# Altium PCB ECB02-Kit-V1.0.PcbDoc
Units mm, origin at the board's own origin, x right, y up, seen from the top; angles counter-clockwise.
Board outline 21 x 30.5 mm, 2 copper layers (Top Layer, Bottom Layer); 9 components, 15 nets, 58 pads, 48 vias.
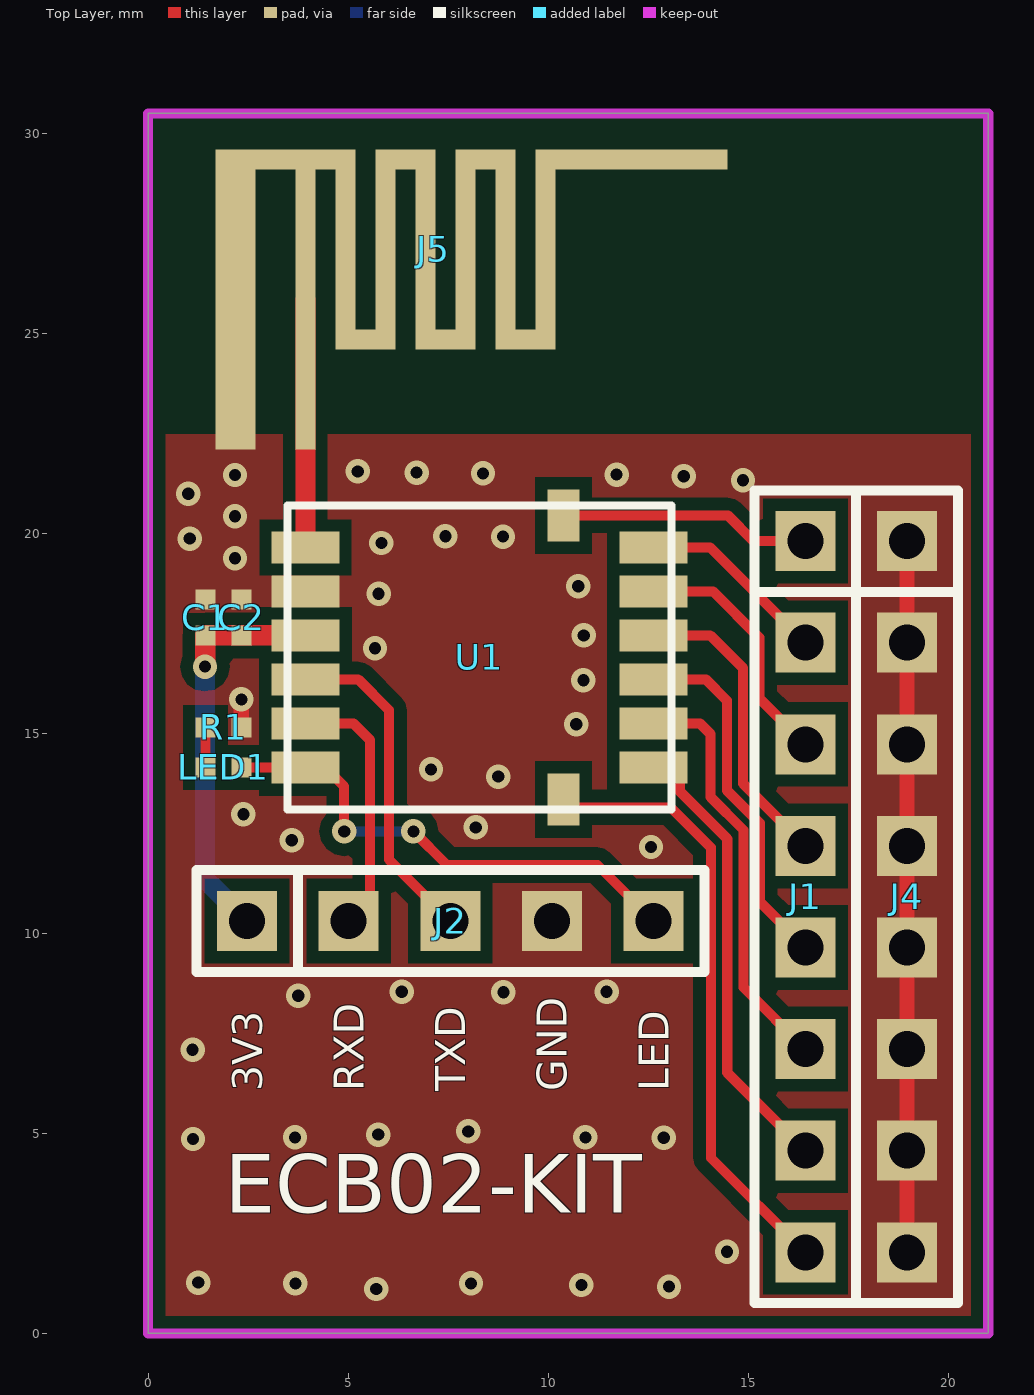
[diagram p0: Top Layer view]
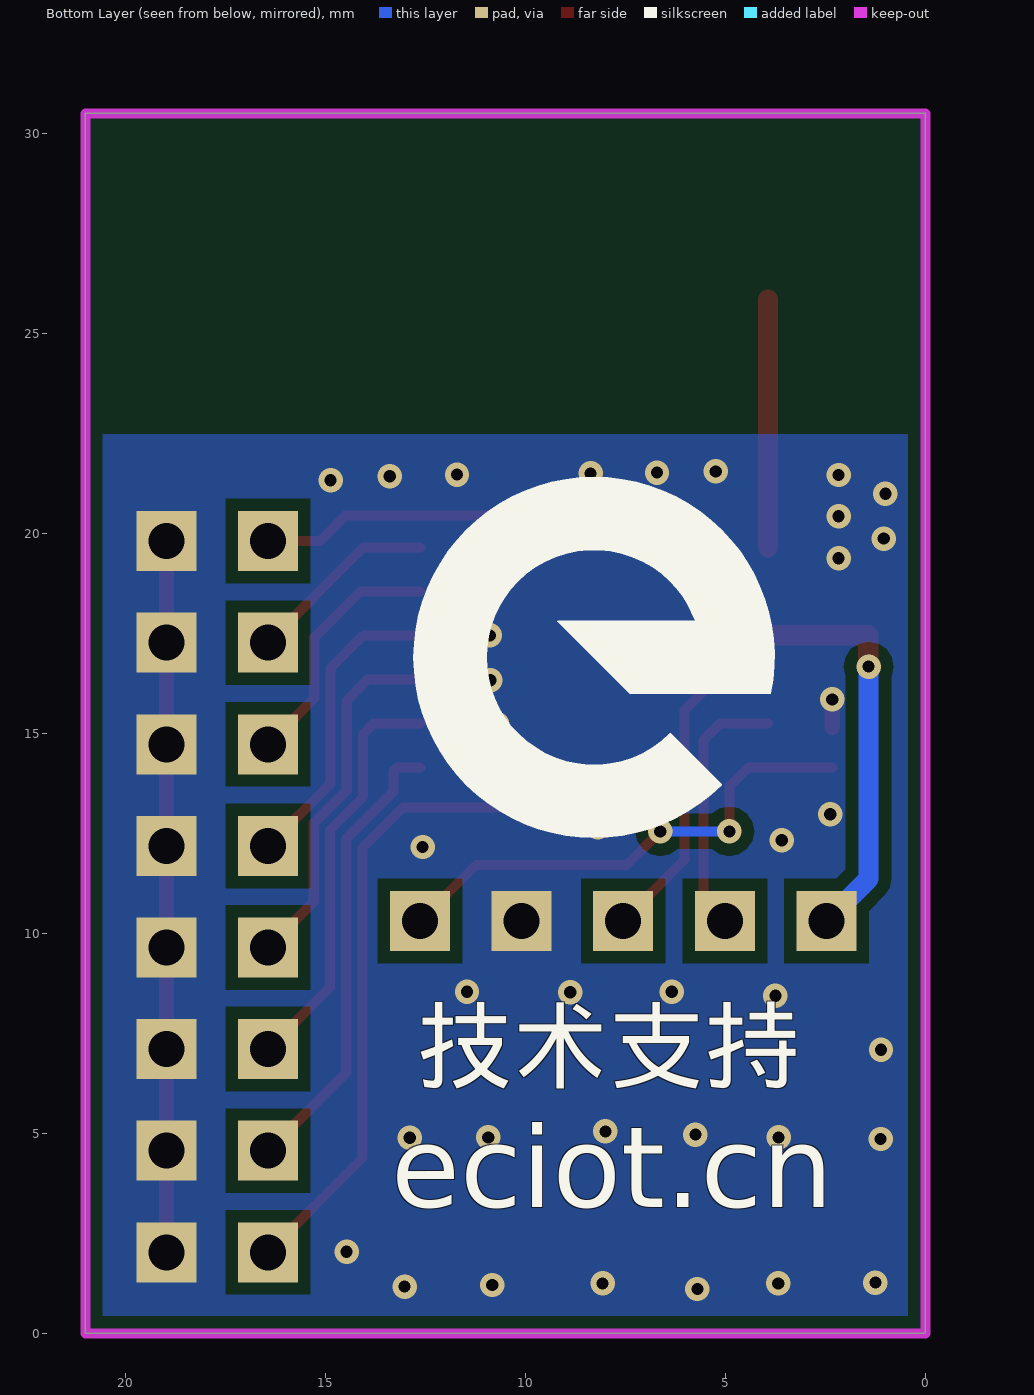
[diagram p1: Bottom Layer view, seen from below]

## Layer stack, top to bottom
Top Solder: solder mask 0.0102, Solder Resist, Dk 3.5
Top Layer: signal copper 0.0356
Dielectric 1: dielectric 0.32, FR-4, Dk 4.8
Bottom Layer: signal copper 0.0356
Bottom Solder: solder mask 0.0102, Solder Resist, Dk 3.5

## Board outline
0,0 0,30.5 21,30.5 21,0

## Design rules (kind name [scope] priority, off if disabled: settings)
Clearance [All] p1: gap=0.152 ignorepadtopadclearanceinfootprint=FALSE except(0: Arc-Hole Track-Hole SMDPad-Hole THPad-Hole Via-Hole Fill-Hole Poly-Hole Region-Hole Text-Hole)
PlaneConnect [All] p1: planeconnectstyle=Direct reliefexpansion=0.508 reliefentries=4 reliefconductorwidth=0.254 reliefairgap=0.254
PolygonConnect [All] p1: connectstyle=Direct reliefconductorwidth=0.254 reliefentries=4 polygonreliefangle="90 Angle" airgapwidth=0.254
RoutingVias [All] p1: holewidth=0.711 width=1.27 viastyle="Through Hole" minholewidth=0.711 minwidth=1.27 maxholewidth=0.711 maxwidth=1.27
SolderMaskExpansion [All] p1: expansion=0.102
Width [All] p1: maxlimit=2.54 minlimit=0.152 preferedwidth=0.254 minimp=50.000000 maximp=50.000000 favimp=50.000000
29 further rules are at their usual default settings.

## Components (designator, comment, footprint, x,y, rotation, side; value= is the part's Value field where it differs from the comment)
C1 "10uF" 0402 1.43,17.9 r270 top
C2 "100nF" 0402 2.33,17.9 r270 top
J1 "CON8" SIP08 16.43,19.807 r270 top
J2 "CON5" SIP05 2.473,10.31 r0 top
J4 "CON8" SIP08 18.97,19.807 r270 top
J5 "ANT" ANT-2.4G-1 2.18,25.85 r0 top
LED1 "0402 蓝" 0402-led 1.88,14.15 r180 top
R1 "2.2kΩ" 0402 1.88,15.15 r0 top
U1 "ECB02S" ECB02S 8.28,16.9 r0 top

## Footprints (in the part's own frame and the unit in brackets; to place one, negate y for a bottom-side part, rotate by r counter-clockwise, add the part's x,y. Pads: shape width x height; smd on the part's side, far side on the other; paste and mask are expansions set on the pad)
0402 [mm]
  rect 0.5x0.5 smd paste+0: 1(-0.45,0) 2(0.45,0)
0402-led [mm]
  rect 0.5x0.5 smd paste+0: 1(-0.45,0) 2(0.45,0)
ANT-2.4G-1 [mm]
  rect 0.5x7.5 smd: 1(1.75,0)
  rect 1x7.5 smd: 2(0,0)
  rect 3.5x0.5 smd: 2(1.25,3.5)
  rect 0.5x5 smd: 2(2.75,1.25) 2(3.75,1.25) 2(4.75,1.25) 2(5.75,1.25) 2(6.75,1.25) 2(7.75,1.25)
  rect 1.5x0.5 smd: 2(3.25,-1) 2(4.25,3.5) 2(5.25,-1) 2(6.25,3.5) 2(7.25,-1)
  rect 4.8x0.5 smd: 2(9.9,3.5)
ECB02S [mm]
  rect 1.7x0.8 smd: 1(4.35,-2.75) 2(4.35,-1.65) 3(4.35,-0.55) 4(4.35,0.55) 5(4.35,1.65) 6(4.35,2.75) 8(-4.35,2.75) 9(-4.35,1.65) 10(-4.35,0.55) 11(-4.35,-0.55) 12(-4.35,-1.65) 13(-4.35,-2.75)
  rect 0.8x1.3 smd: 7(2.1,3.55) 14(2.1,-3.55)
  silkscreen extent -4.8,-3.8 4.8,3.8
SIP05 [mm]
  rect 1.5x1.5 hole 0.9: 1(0,0) 2(2.54,0) 3(5.08,0) 4(7.62,0) 5(10.16,0)
  silkscreen extent -1.27,-1.27 11.43,1.27
SIP08 [mm]
  rect 1.5x1.5 hole 0.9: 1(0,0) 2(2.54,0) 3(5.08,0) 4(7.62,0) 5(10.16,0) 6(12.7,0) 7(15.24,0) 8(17.78,0)
  silkscreen extent -1.27,-1.27 19.05,1.27

## Part data
C1 C2: library part C, 封装=0402, 类型=电容
LED1: library part LED-0402, 封装=0402, 类型=LED
R1: library part R, 封装=0402, 类型=电阻

## Via types
v1: diameter 0.61, hole 0.305, Top Layer to Bottom Layer, tented both sides, 48 vias

## Nets (pads, with @x,y where several pads share a name; then routed paths per layer and width w, separated by ;. In a path a pad name is that pad's centre, name@x,y a point inside that pad or via, vN(x,y) a via of type N, cw(c..) or ccw(c..) an arc to the next point about the centre after c; other vN are vias at no path point)
+3.3V: C1.2 C2.2 J2.1 U1.10 | length 10.1
  Top Layer w0.508: v1(1.42,16.67) 1.43,16.68 C1.2 C2.2 U1.10
  Bottom Layer w0.508: v1(1.42,16.67) 1.42,11.363 J2.1
GND: C1.1 C2.1 J2.4 J4.1 J4.2 J4.3 J4.4 J4.5 J4.6 J4.7 J4.8 J5.2 R1.2 U1.9 | length 18.5
  Top Layer w0.381: R1.2 v1(2.33,15.85) ; J4.8 J4.7 J4.6 J4.5 J4.4 J4.3 J4.2 J4.1
  other v1: 5.7,1.11 13.02,1.17 10.83,1.21 3.68,1.25 8.07,1.25 1.25,1.27 14.47,2.04 1.12,4.86 3.67,4.9 10.93,4.9 12.89,4.89 5.75,4.97 8,5.05 1.11,7.09 3.75,8.44 6.34,8.54 8.88,8.53 11.46,8.54 12.57,12.16 3.59,12.33 8.19,12.65 2.38,12.98 8.75,13.92 7.07,14.1 10.7,15.23 10.88,16.33 5.67,17.13 10.89,17.45 5.76,18.49 10.75,18.68 2.17,19.38 5.83,19.76 1.04,19.87 8.87,19.92 7.43,19.93 2.17,20.43 1,20.99 14.87,21.33 13.39,21.43 2.17,21.46 11.71,21.47 6.71,21.52 8.37,21.5 5.24,21.55
LED: J2.5 LED1.1 U1.13 | length 12.6
  Top Layer w0.254: LED1.1 U1.13 4.42,14.15 4.9,13.67 v1(4.9,12.55) ; v1(6.63,12.55) 7.47,11.71 11.233,11.71 J2.5
  Bottom Layer w0.254: v1(4.9,12.55) v1(6.63,12.55)
NetJ1_1: J1.1 U1.7 | length 6.3
  Top Layer w0.254: U1.7 14.49,20.45 15.133,19.807 J1.1
NetJ1_2: J1.2 U1.6 | length 4.8
  Top Layer w0.254: U1.6 14.047,19.65 J1.2
NetJ1_3: J1.3 U1.5 | length 6.3
  Top Layer w0.254: U1.5 14.12,18.55 15.28,17.39 15.28,15.877 J1.3
NetJ1_4: J1.4 U1.4 | length 7.7
  Top Layer w0.254: U1.4 14.05,17.45 14.874,16.626 14.874,13.743 J1.4
NetJ1_5: J1.5 U1.3 | length 9
  Top Layer w0.254: U1.3 13.94,16.35 14.467,15.823 14.467,13.575 15.29,12.752 15.29,10.787 J1.5
NetJ1_6: J1.6 U1.2 | length 10.4
  Top Layer w0.254: U1.2 13.79,15.25 14.061,14.979 14.061,13.406 14.884,12.584 14.884,8.653 J1.6
NetJ1_7: J1.7 U1.1 | length 11.5
  Top Layer w0.254: U1.1 13.21,14.15 13.3,14.06 13.3,13.54 14.477,12.363 14.477,6.519 J1.7
NetJ1_8: J1.8 U1.14 | length 15.3
  Top Layer w0.254: U1.14 10.58,13.15 13.06,13.15 14.071,12.139 14.071,4.386 J1.8
NetJ5_1: J5.1 U1.8 | length 6.2
  Top Layer w0.5: U1.8 J5.1
NetLED1_2: LED1.2 R1.1 | length 1
  Top Layer w0.254: LED1.2 R1.1
RXD: J2.2 U1.12 | length 6.5
  Top Layer w0.254: U1.12 5.13,15.25 5.55,14.83 5.55,10.847 J2.2
TXD: J2.3 U1.11 | length 8.3
  Top Layer w0.254: U1.11 5.25,16.35 6.02,15.58 6.02,11.843 J2.3

## Polygon pours and split planes (outlines as drawn)
GND on Bottom Layer "Bottom Layer-GND" (solid, remove dead copper, pour order 6): 0,22.48 21,22.48 21,0 0,0
GND on Top Layer "Top Layer-GND" (solid, remove dead copper, pour order 4): 0,0 21,0 21,22.48 0,22.48

## Keep-outs
Keep-Out Layer:
  the board outline again, w0.254

## Silkscreen, mask and mechanical layers (free items; w line width, h text height)
Top Overlay:
  text "3V3" at 2.848,6.05 h0.75 r90
  text "RXD" at 5.388,6.05 h0.75 r90
  text "TXD" at 7.928,6.05 h0.75 r90
  text "GND" at 10.468,6.05 h0.75 r90
  text "LED" at 13.008,6.05 h0.75 r90
  text "ECB02-KIT" at 1.91,2.53 h2.5
Bottom Overlay:
  region: 5.092,13.708 cw(c5.102,13.718) 5.092,13.728 6.365,15 6.365,15.001 ccw(c6.375,14.991) 6.365,15 6.365,15.001 cw(c6.375,14.991) 6.385,15.001 ccw(c8.284,16.9) 10.183,15 cw(c10.193,14.991) 10.183,15.001 ccw(c8.284,16.9) 10.97,16.9 ccw(c8.284,16.9) 10.183,18.799 ccw(c8.284,16.9) 6.385,18.8 ccw(c8.284,16.9) 6.385,18.799 ccw(c6.375,18.809) 6.385,18.8 6.385,18.799 ccw(c8.284,16.9) 5.758,17.814 9.184,17.814 cw(c9.184,17.8) 9.198,17.8 cw(c9.184,17.8) 9.194,17.79 cw(c9.184,17.8) 9.194,17.79 7.394,15.99 cw(c7.384,16) 7.394,15.99 cw(c7.384,16) 7.384,15.986 3.875,15.986 cw(c3.875,16) 3.861,15.997 cw(c8.284,16.9) 5.092,20.092 cw(c8.284,16.9) 11.475,20.093 cw(c11.466,20.082) 11.476,20.092 cw(c8.284,16.9) 12.798,16.9 cw(c8.284,16.9) 11.476,13.708 cw(c8.284,16.9)
  text "技术支持" at 12.72,5.77 h3
  text "eciot.cn" at 13.35,2.48 h3.5
Mechanical 1:
  lines w0.254: 0,22.47 21,22.47

## Text inside footprints (layer, text, board x,y; h text height)
LED1: Mechanical 1 "+" at 2.55,14.25 h0.2 r180